# Altium PCB PCB1.PcbDoc
Units mm, origin at the board's own origin, x right, y up, seen from the top; angles counter-clockwise.
Board outline 115 x 72.5 mm, 2 copper layers (Top Layer, Bottom Layer); 54 components, 40 nets, 216 pads, 66 vias.
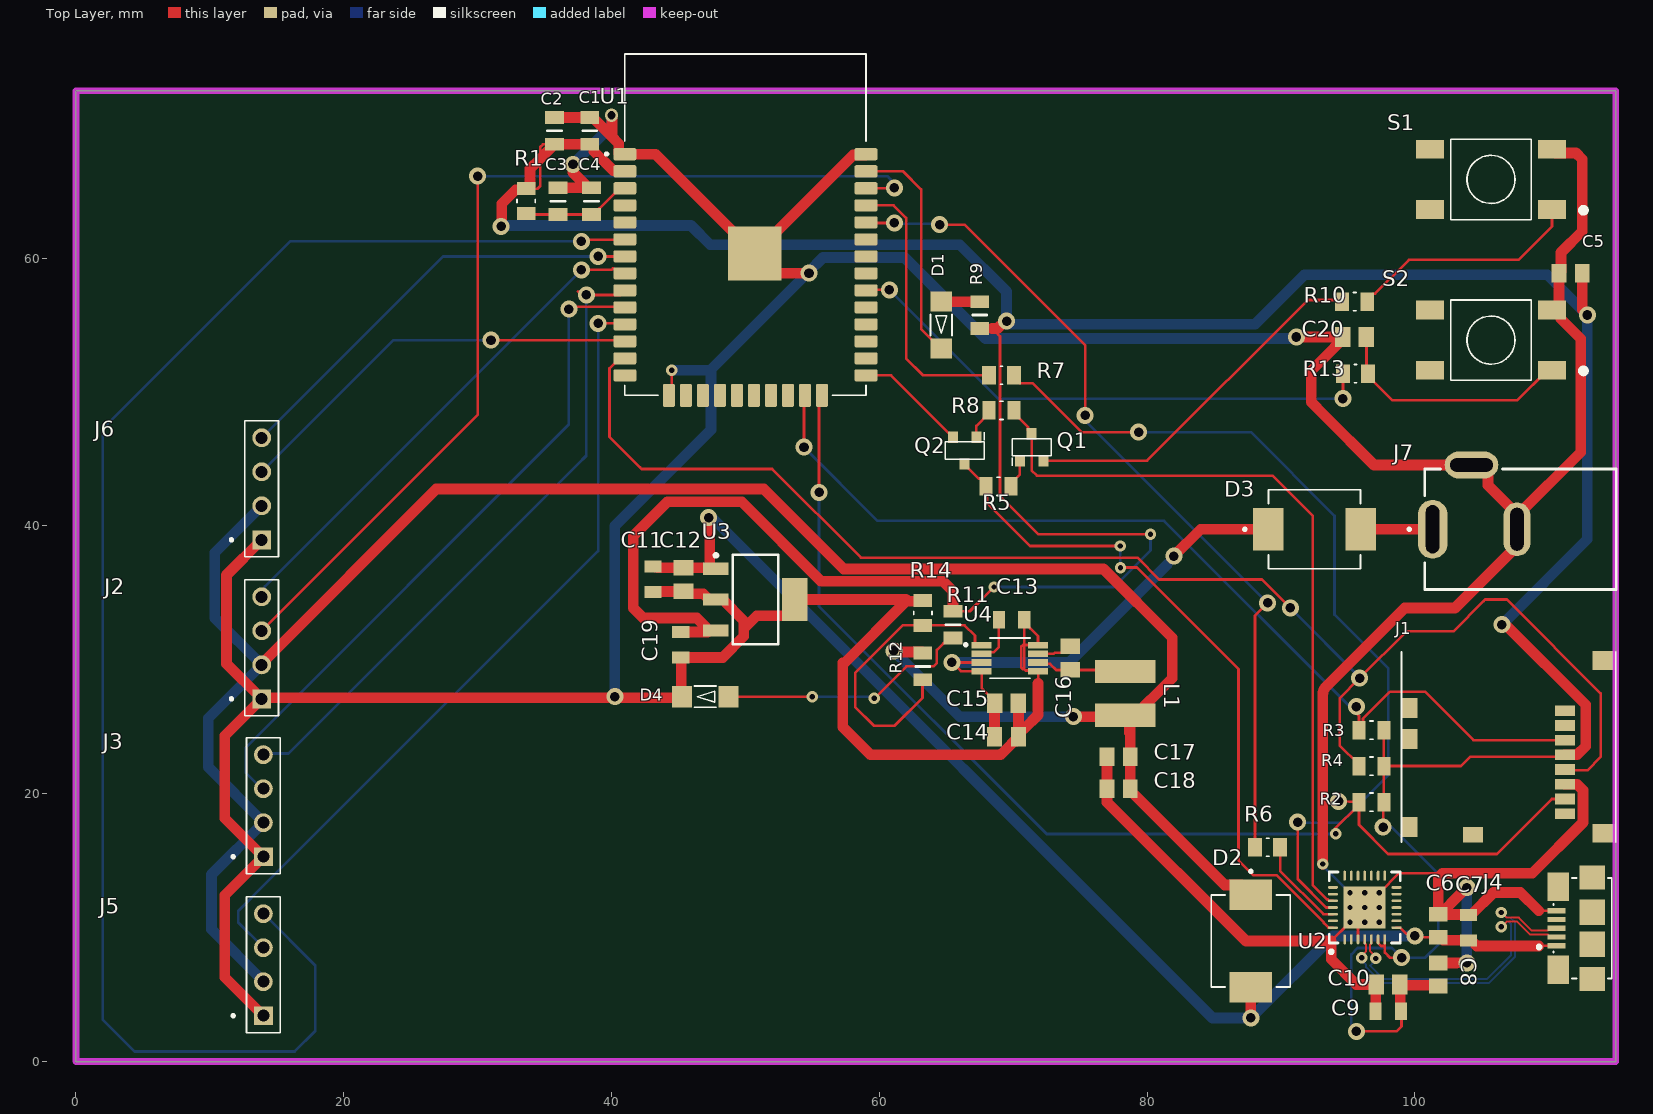
[diagram p0: Top Layer view]
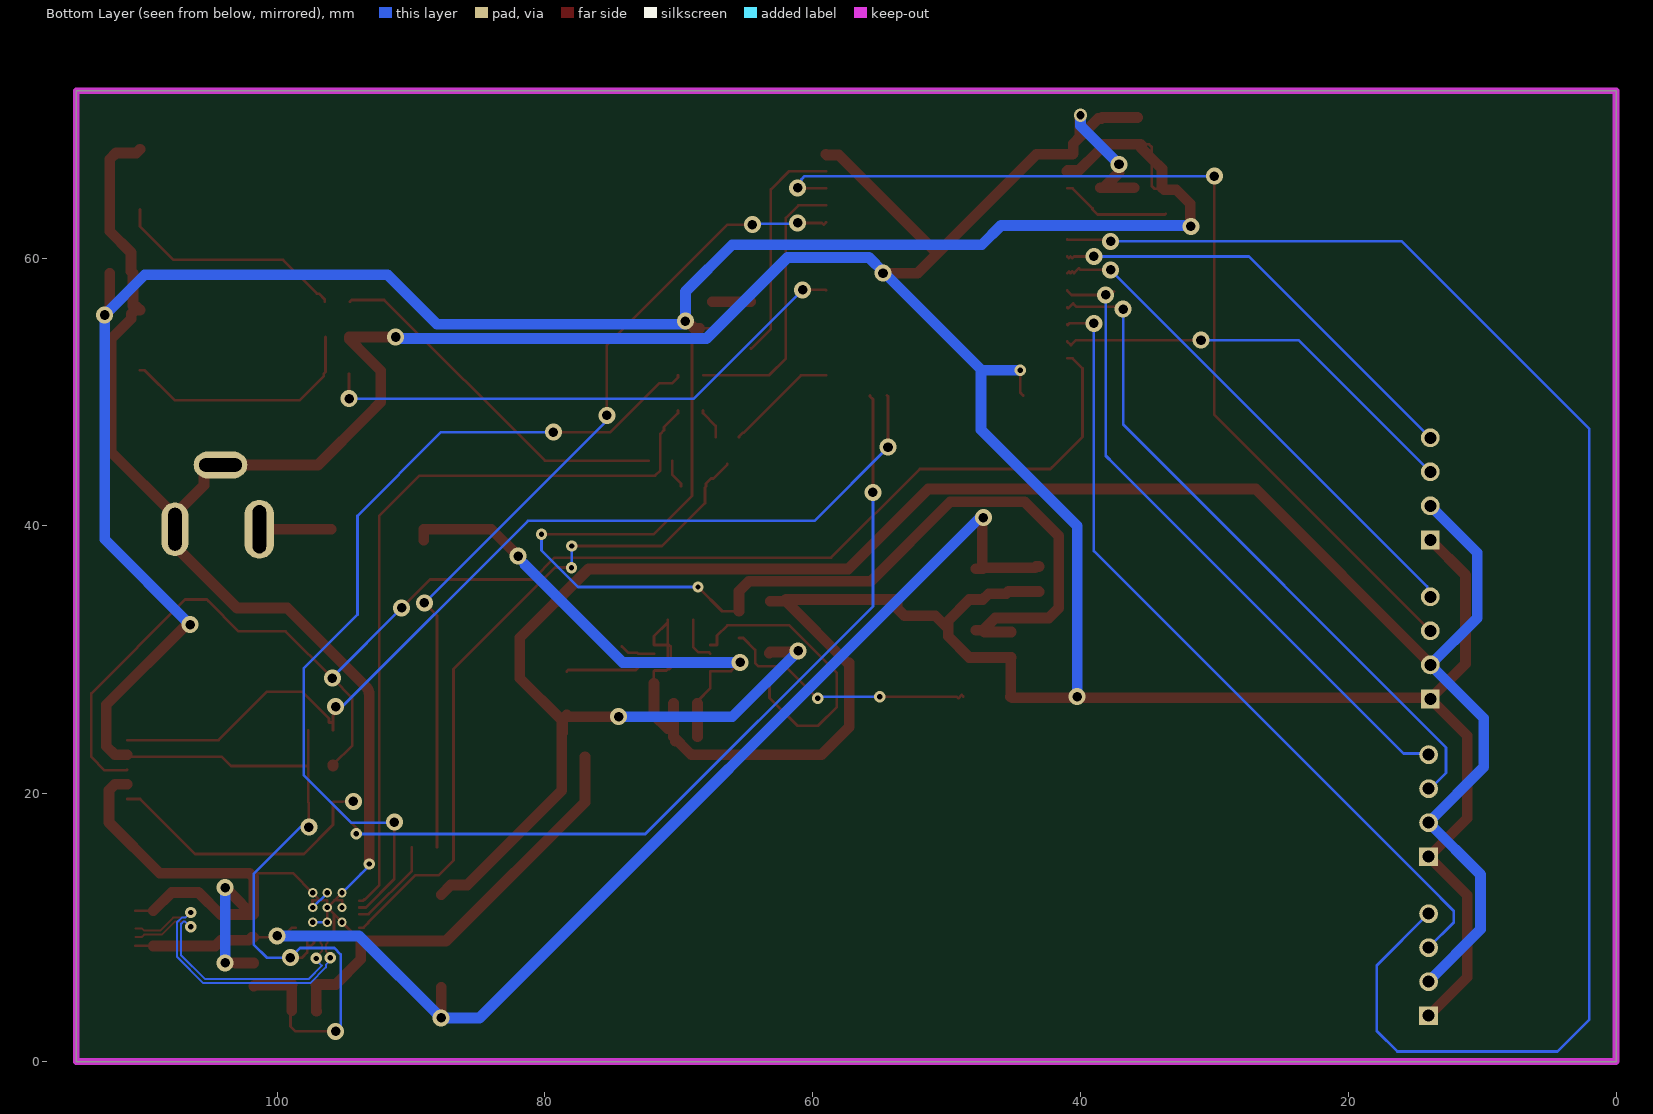
[diagram p1: Bottom Layer view, seen from below]
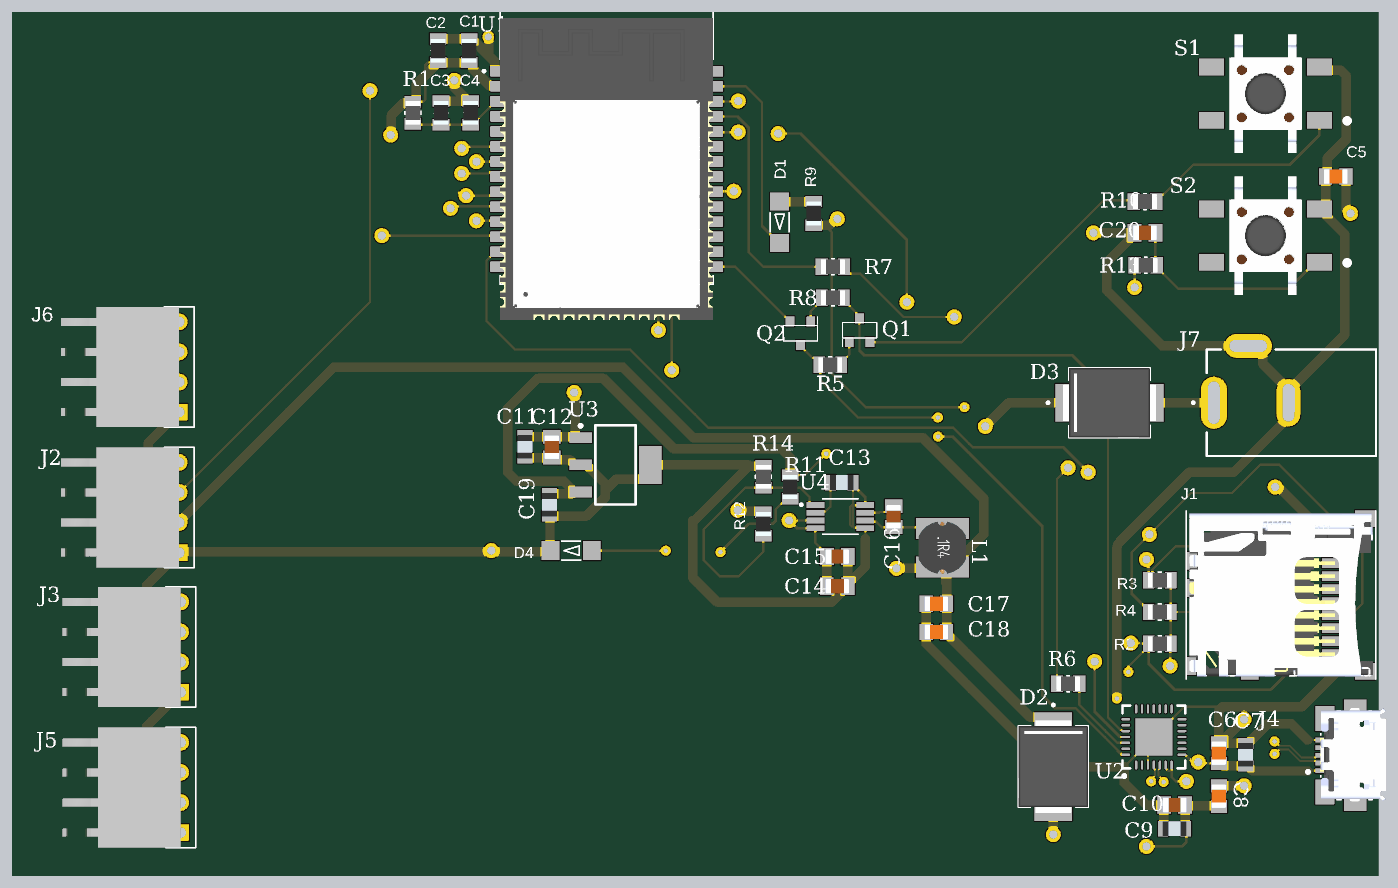
[diagram p2: 3D render of the assembled board from above, using the file's embedded part models]

## Layer stack, top to bottom
Top Solder: solder mask 0.0102, Solder Resist, Dk 3.5
Top Layer: signal copper 0.0356
Dielectric 1: dielectric 0.32, FR-4, Dk 4.8
Bottom Layer: signal copper 0.0356
Bottom Solder: solder mask 0.0102, Solder Resist, Dk 3.5

## Board outline
0,0 115,0 115,72.5 0,72.5

## Design rules (kind name [scope] priority, off if disabled: settings)
Clearance [All] p1: gap=0.15 ignorepadtopadclearanceinfootprint=FALSE
DiffPairsRouting [All] p1: maxlimit=0.15 minlimit=0.15 mostfreqgap=0.15 toplayer_minwidth=0.15 toplayer_maxwidth=0.15 toplayer_prefwidth=0.15 bottomlayer_minwidth=0.15 bottomlayer_maxwidth=0.15 bottomlayer_prefwidth=0.15 maxuncoupledlength=12.7
HoleSize [All] p1: absolutevalues=TRUE maxlimit=3.6 minlimit=0.3 maxpercent=80.000 minpercent=20.000
HoleToHoleClearance [All] p1: gap=0.254 allowstackedmicrovias=FALSE
PolygonConnect [All] p1: thpad.connectstyle=Relief thpad.reliefconductorwidth=0.254 thpad.reliefentries=4 thpad.polygonreliefangle="90 Angle" thpad.airgapwidth=0.254 smdpad.connectstyle=Relief smdpad.reliefconductorwidth=0.254 smdpad.reliefentries=4 smdpad.polygonreliefangle="90 Angle" smdpad.airgapwidth=0.254 via.connectstyle=Direct via.reliefconductorwidth=0.254 via.reliefentries=4 via.polygonreliefangle="90 Angle" via.airgapwidth=0.254
RoutingVias [All] p1: holewidth=0.4 width=0.85 viastyle="Through Hole" minholewidth=0.4 minwidth=0.7 maxholewidth=0.8 maxwidth=1.5
SilkToSilkClearance [All] p1: silktosilkclearance=0
SilkToSolderMaskClearance [IsPad] p1: minsilkscreentomaskgap=0.15 clearancetoexposedcopper=TRUE
SolderMaskExpansion [All] p1: expansion=0.102 istentingtop=FALSE
Width [All] p1: maxlimit=0.8 minlimit=0.15 preferedwidth=0.2
25 further rules are at their usual default settings.

## Classes and differential pairs
differential pair USB: +USB_P -USB_N

## Components (designator, comment, footprint, x,y, rotation, side; value= is the part's Value field where it differs from the comment)
C1 "08055C104KAT4A" RESC2012X60N 38.375,69.5 r270 top value=0.1uF/50V
C2 "CL21A106KAYNNNE" RESC2012X60N 35.75,69.5 r270 top value=10uF/25V
C3 "CL21A106KAYNNNE" RESC2012X60N 36,64.25 r270 top value=10uF/25V
C4 "08055C104KAT4A" RESC2012X60N 38.5,64.25 r270 top value=0.1uF/50V
C5 "CL21A106KAYNNNE" CAPC2012X135N 111.625,58.875 r0 top value=10uF/25V
C6 "CL21A106KAYNNNE" CAPC2012X135N 101.75,10.137 r270 top value=10uF/25V
C7 "885012207022" WCAP-CSGP_885012207022 104,10 r90 top value=1uF
C8 "CL21A106KAYNNNE" CAPC2012X135N 101.75,6.5 r270 top value=10uF/25V
C9 "885012207022" WCAP-CSGP_885012207022 98,3.75 r180 top value=1uF
C10 "08055C104KAT4A" CAPC2012X94N 98,5.75 r0 top value=0.1uF/50V
C11 "885012207022" WCAP-CSGP_885012207022 43.1,36.025 r270 top value=1uF
C12 "08055C104KAT4A" CAPC2012X94N 45.375,36 r90 top value=0.1uF/50V
C13 "885012207022" WCAP-CSGP_885012207022 69.875,33 r180 top value=1uF
C14 "GRM21BR61H106KE43L" CAPC2012X145N 69.5,24.25 r180 top value=10uF/50V
C15 "08055C104KAT4A" CAPC2012X94N 69.5,26.75 r180 top value=0.1uF/50V
C16 "08055C104KAT4A" CAPC2012X94N 74.25,30.12 r270 top value=0.1uF/50V
C17 "CL21A106KAYNNNE" CAPC2012X135N 77.875,22.75 r0 top value=10uF/25V
C18 "CL21A106KAYNNNE" CAPC2012X135N 77.875,20.375 r0 top value=10uF/25V
C19 "885012207022" WCAP-CSGP_885012207022 45.175,31.125 r270 top value=1uF
C20 "08055C104KAT4A" CAPC2012X94N 95.5,54.107 r0 top value=0.1uF/50V
D1 "WL-SMRW" WL-SMRW-1206-RECT 64.625,55 r90 top
D2 "SS34" DIOM7959X265N 87.75,9 r270 top
D3 "SS34" DIOM7959X265N 92.5,39.75 r0 top
D4 "WL-SMRW" WL-SMRW-1206-RECT 47,27.25 r0 top
J1 "502570-0893" MOLEX_502570-0893 107,23.5 r270 top
J2 "215297-4" TE_215297-4 13.875,30.895 r90 top
J3 "215297-4" TE_215297-4 14,19.105 r90 top
J4 "10118192-0001LF" AMPHENOL_10118192-0001LF 110.575,9.95 r90 top
J5 "215297-4" TE_215297-4 14,7.23 r90 top
J6 "215297-4" TE_215297-4 13.875,42.77 r90 top
J7 "DCJ235-05-A-XX-X_REVA" GCT_DCJ235-05-A-XX-X_REVA 107.875,39.75 r90 top
L1 "744773122" WE-PD2-S 78.375,27.5 r270 top
Q1 "SS8050-G" MBTB-T-SOT23 71.375,45.875 r90 top
Q2 "SS8050-G" MBTB-T-SOT23 66.375,45.625 r270 top
R1 "ESR10EZPF1002" RESC2012X65N 33.625,64.25 r90 top value=10K/1%
R2 "ESR10EZPF1002" RESC2012X65N 96.75,19.375 r0 top value=10K/1%
R3 "ESR10EZPF1002" RESC2012X65N 96.75,24.75 r0 top value=10K/1%
R4 "ESR10EZPF1002" RESC2012X65N 96.75,22.063 r0 top value=10K/1%
R5 "ESR10EZPF1002" RESC2012X65N 68.9,42.95 r0 top value=10K/1%
R6 "ERJ-PB6B4700V" RESC2012X70N 89,16 r0 top value=470R
R7 "ERJ-PB6B4700V" RESC2012X70N 69.125,51.25 r0 top value=470R
R8 "ESR10EZPF1002" RESC2012X65N 69.125,48.625 r180 top value=10K/1%
R9 "RK73H2ATTD1100F" RESC2012X60N 67.5,55.75 r270 top
R10 "ERJ-PB6B4700V" RESC2012X70N 95.5,56.75 r0 top value=470R
R11 "RK73H2ATTD1100F" RESC2012X60N 65.5,32.625 r90 top
R12 "ERJ-PB6B5232V" RESC2012X60N 63.25,29.5 r90 top value=52K3
R13 "ERJ-PB6B4700V" RESC2012X70N 95.565,51.375 r0 top value=470R
R14 "ESR10EZPF1002" RESC2012X65N 63.25,33.5 r270 top value=10K/1%
S1 "5-1437565-0" SW_5-1437565-0 105.685,65.875 r180 top
S2 "5-1437565-0" SW_5-1437565-0 105.685,53.875 r180 top
U1 "ESP-WROOM-32" MODULE_ESP-WROOM-32 50,59.5 r0 top
U2 "CP2109-A01-GM" SLAB-QFN-28-3125x3125TP_L 96.25,11.5 r90 top
U3 "TC1264-3.3VDBTR" SOT-223-DB3_L 50.75,34.5 r0 top
U4 "MCP16311T-E/MS" SOP65P490X110-8N 69.75,30.125 r0 top

## Footprints (in the part's own frame and the unit in brackets; to place one, negate y for a bottom-side part, rotate by r counter-clockwise, add the part's x,y. Pads: shape width x height; smd on the part's side, far side on the other; paste and mask are expansions set on the pad)
AMPHENOL_10118192-0001LF [mm]
  rect 0.4x1.35 smd: 1(-1.3,0) 2(-0.65,0) 3(0,0) 4(0.65,0) 5(1.3,0)
  rect 2.1x1.6 smd: SH1(-3.1,-0.125) SH2(3.1,-0.125)
  rect 1.8x1.9 smd: SH3(-3.8,-2.675) SH6(3.8,-2.675)
  rect 1.9x1.9 smd: SH4(-1.2,-2.675) SH5(1.2,-2.675)
  silkscreen extent -3.75,-4.13 3.75,1.4, body extent -3.9,-5.34 4,0.28, height 2.7
CAPC2012X94N [mm]
  rect 1.16x1.47 smd: 1(-0.88,0) 2(0.88,0)
  body extent -1,-0.62 1.01,0.63, height 0.94
CAPC2012X135N [mm]
  rect 1.1x1.38 smd: 1(-0.863,0) 2(0.863,0)
  body extent -1,-0.63 1,0.63, height 1.35
CAPC2012X145N [mm]
  rect 1.11x1.47 smd: 1(-0.9,0) 2(0.9,0)
  body extent -1,-0.63 1,0.63, height 1.45
DIOM7959X265N [mm]
  rect 2.25x3.18 smd: A(3.455,0) C(-3.455,0)
  silkscreen extent -5.3,-2.95 3.44,2.95, body extent -3.97,-2.95 3.98,2.95, height 1.2
GCT_DCJ235-05-A-XX-X_REVA [mm]
  oval 4.4x2.2 hole 1 slot 3.6 at 0 deg: 1(0,6.55)
  oval 4x2 hole 1 slot 3.2 at 0 deg: 2(0,0.25)
  oval 2x4 hole 1 slot 3.2 at 90 deg: 3(4.8,3.65)
  silkscreen extent -4.5,-7.15 4.5,8.4
MBTB-T-SOT23 [mm]
  rect 0.85x0.75 smd: 1(-1,0.875) 2(-1,-0.875) 3(1,0)
  silkscreen extent -1.37,-1.45 0.65,1.45
MODULE_ESP-WROOM-32 [mm]
  rrect22% 1.7x0.9 smd: 1(-9,8.255) 2(-9,6.985) 3(-9,5.715) 4(-9,4.445) 5(-9,3.175) 6(-9,1.905) 7(-9,0.635) 8(-9,-0.635) 9(-9,-1.905) 10(-9,-3.175) 11(-9,-4.445) 12(-9,-5.715) 13(-9,-6.985) 14(-9,-8.255) 25(9,-8.255) 26(9,-6.985) 27(9,-5.715) 28(9,-4.445) 29(9,-3.175) 30(9,-1.905) 31(9,-0.635) 32(9,0.635) 33(9,1.905) 34(9,3.175) 35(9,4.445) 36(9,5.715) 37(9,6.985) 38(9,8.255)
  rect 4x4 smd: 1.1(0.7,0.845)
  rrect22% 0.9x1.7 smd: 15(-5.715,-9.755) 16(-4.445,-9.755) 17(-3.175,-9.755) 18(-1.905,-9.755) 19(-0.635,-9.755) 20(0.635,-9.755) 21(1.905,-9.755) 22(3.175,-9.755) 23(4.445,-9.755) 24(5.715,-9.755)
  silkscreen extent -10.46,-9.75 9,15.75, body extent -9,-12.75 9,12.75, height 3.25
MOLEX_502570-0893 [mm]
  rect 0.8x1.5 smd: 1(-2.7,4.2) 2(-1.6,4.2) 3(-0.5,4.2) 4(0.6,4.2) 5(1.7,4.2) 6(2.8,4.2) 7(3.9,4.2) 8(5,4.2)
  rect 1.15x1.5 smd: DL(6.575,-2.65)
  rect 1.5x1.15 smd: DS(-0.6,-7.375) SM3(-2.9,-7.375) SM4(6,-7.375)
  rect 1.4x1.7 smd: SM1(-6.45,7.1) SM2(6.45,7.1)
  silkscreen extent -7.1,-8 7.1,8, body extent -6.9,-7.75 6.9,7.75, height 1.95
RESC2012X60N [mm]
  rect 0.95x1.4 smd: 1(-1,0) 2(1,0)
  silkscreen extent 0,-0.53 0,0.53, body extent -1,-0.63 1,0.63, height 0.6
RESC2012X65N [mm]
  rect 0.97x1.38 smd: 1(-0.93,0) 2(0.93,0)
  silkscreen extent -0.12,-0.68 0.12,0.68, body extent -1,-0.63 1,0.63, height 0.65
RESC2012X70N [mm]
  rect 1.04x1.38 smd: 1(-0.94,0) 2(0.94,0)
  silkscreen extent -0.1,-0.68 0.1,0.68, body extent -1,-0.63 1,0.63, height 0.7
SLAB-QFN-28-3125x3125TP_L [mm] "QFN, 28-Leads, Body 5x5mm, Pitch 0.5mm, Thermal Pad 3.13x3.13mm, IPC High Density"
  oval 0.75x0.2 smd: 1(-2.375,1.5) 2(-2.375,1) 3(-2.375,0.5) 4(-2.375,0) 5(-2.375,-0.5) 6(-2.375,-1) 7(-2.375,-1.5) 15(2.375,-1.5) 16(2.375,-1) 17(2.375,-0.5) 18(2.375,0) 19(2.375,0.5) 20(2.375,1) 21(2.375,1.5)
  oval 0.2x0.75 smd: 8(-1.5,-2.375) 9(-1,-2.375) 10(-0.5,-2.375) 11(0,-2.375) 12(0.5,-2.375) 13(1,-2.375) 14(1.5,-2.375) 22(1.5,2.375) 23(1,2.375) 24(0.5,2.375) 25(0,2.375) 26(-0.5,2.375) 27(-1,2.375) 28(-1.5,2.375)
  rect 3.13x3.13 smd: 29(0,0)
  silkscreen extent -3.42,-2.65 2.65,2.65, body extent -2.5,-2.5 2.5,2.5, height 1
SOP65P490X110-8N [mm]
  rect 1.5x0.49 smd: 1(-2.105,0.975) 2(-2.105,0.325) 3(-2.105,-0.325) 4(-2.105,-0.975) 5(2.105,-0.975) 6(2.105,-0.325) 7(2.105,0.325) 8(2.105,0.975)
  silkscreen extent -3.4,-1.5 1.5,1.5
SOT-223-DB3_L [mm] "SOT223, 4-Leads, Body 6.5x3.5mm, Pitch 2.3mm, Lead Span 7mm, IPC High Density"
  rect 1.9x0.9 smd: 1(-2.95,2.3) 2(-2.95,0) 3(-2.95,-2.3)
  rect 1.9x3.2 smd: 4(2.95,0)
  silkscreen extent -3.07,-3.35 1.7,3.42, body extent -1.85,-3.35 1.85,3.35, height 1.8
SW_5-1437565-0 [mm]
  rect 2.1x1.4 smd: 1(-4.55,2.25) 2(4.55,2.25) 3(-4.55,-2.25) 4(4.55,-2.25)
  silkscreen extent -7.1,-3 3,3, body extent -3,-5 3,5, height 7.26
TE_215297-4 [mm]
  rect 1.408x1.408 hole 0.9: 1(-3.81,0)
  round 1.408 hole 0.9: 2(-1.27,0) 3(1.27,0) 4(3.81,0)
  silkscreen extent -5.08,-1.26 5.08,2.36, body extent -5.08,0 5.08,10, height 1.26
WCAP-CSGP_885012207022 [mm]
  rect 0.9x1.3 smd: 1(-0.95,0) 2(0.95,0)
  body extent -1,-0.62 1,0.63, height 0.63
WE-PD2-S [mm] "SMD Inductor, 2-Leads, Body 4.5 x 4.0 mm"
  rect 1.75x4.5 smd: 1(-1.625,0) 2(1.625,0)
  body extent -2.23,-2 2.23,2, height 3.17
WL-SMRW-1206-RECT [mm]
  rect 1.5x1.6 smd: 1(-1.75,0) 2(1.75,0)
  silkscreen extent -0.8,-0.8 0.8,0.8

## Part data
C1 C4 C10 C12 C15 C16 C20: ".1UF 50V 10% 0805", Package=None, Availability=Unavailable, MF="{'manufacturer': u'AVX'}", MP=08055C104KAT4A, Price=None
C2 C3 C5 C6 C8 C17 C18: "Cap Ceramic 10uF 25V X5R 10% SMD 0805 85Â°C Embossed T/R", Package=None, Availability=Unavailable, MF="{'manufacturer': u'Samsung'}", MP=CL21A106KAYNNNE, Price=None
C7 C9 C11 C13 C19: "<b> WCAP-CSGP Ceramic Capacitors <br> <br> <br><b>Characteristics </b><br> </b><br>Multilayer Ceramic Chip Capacitor <br>Recommended soldering:Reflow, for 0603 and 0805 wave soldering is also allowed <br>Operating temperature:-55 Â°C to +125 Â°C; <br>Ceramic characteristics: Class I - NPO ; Class II -X7R, X5R <br>High performance ceramic <br>High capacitance stability <br>Minimal aging  <br>Termination:Cu/Ni/Sn <br>   <br><a href=\"http://katalog.we-online.de/media/images/eisos/WCAP-CSGP_pf2.jpg\" title=\"Enlarge picture\"> <img src=\"http://katalog.we-online.de/media/thumbs2/eisos/thb_WCAP-CSGP_pf2.jpg\" width=\"320\"></a><p> Details see: <a href=\"http://katalog.we-online.de/en/pbs/WCAP-CSGP-0805?\">http://katalog.we-online.de/en/pbs/WCAP-CSGP-0805? </a><p>Created:  2015-01-28 <br>2015 (C) Wurth Elektronik", Package=None, Availability=Unavailable, MF="{'manufacturer': u'Wurth Electronics Inc'}", MP=885012207022, Price=None
C14: "SMD Capacitor X5R(EIA) with Capacitance: 10uF Tol. 10%. Rated Voltage: 50Vdc", Package=None, Availability=Unavailable, MF="{'manufacturer': u'Murata Electronics'}", MP=GRM21BR61H106KE43L, Price=None
D1 D4: "<b>SMD Reverse mount mono-color rectangular <br> <br> <br><b> Characteristics <br><br></b></b> Small size & thin body for space saving  <br> Ideal for narrow space applications  <br> Wide viewing angle  <br> Low power consumption  <br> Industry standard footprint  <br> Small package for exceptional brightness <br> To emit light through a small cut-out hole in PCB  <br> Compatible with automatic placement machine <br>  <br><b> Applications  <br><br></b> Front panel indicators  <br> LCD backlighting  <br> Keypad backlighting  <br> Push button backlighting  <br> Symbol and switch backlighting  <br> General lighting <br> <br> <br> <br><a href=\"http://katalog.we-online.de/media/images/eipal/WL-SMRW_pf2.jpg\" title=\"Enlarge picture\"> <img src=\"http://katalog.we-online.de/media/thumbs2/eipal/thb_WL-SMRW_pf2.jpg\" width=\"320\"></a><p> Details see: <a href=\"http://katalog.we-online.de/en/led/WL-SMRW?m\">http://katalog.we-online.de/en/led/WL-SMRW?m</a><p>  </b>Updated  2015-04-10<br> </b>2015 (C) Wurth Elektronik", Package=None, Availability=Unavailable, MF="{'manufacturer': u'Wurth Electronics'}", MP=WL-SMRW, Price=None
D2 D3: "Diode Schottky 40V 3A 2-Pin SMC T/R", Package=None, Availability=Unavailable, MF="{'manufacturer': u'ON Semiconductor'}", MP=SS34, Price=None
J1: "<b>1.10mm Pitch microSD Memory Card Connector, Normal Mount Surface Mount, Push-Push Type</b><p>http://www.snapeda.com/parts/502570-0893/Molex/view-part/", Package=None, Availability=Unavailable, MF="{'manufacturer': u'Molex'}", MP=502570-0893, Price=None
J2 J3 J5 J6 R6 R7 R10 R12 R13: Package=None, Availability=Unavailable, Price=None
  J2 J3 J5 J6: MF="{'manufacturer': u'TE Connectivity'}", MP=215297-4
  R6 R7 R10 R13: MF="{'manufacturer': u'Panasonic'}", MP=ERJ-PB6B4700V
  R12: MP=ERJ-PB6B5232V
J4: "Single Port 5 Contact Horizontal Right Angle Shielded Micro B USB 2.0 Connector", Package=None, Availability=Unavailable, MF="{'manufacturer': u'FCI'}", MP=10118192-0001LF, Price=None
J7: "DC Power Jack, Thru-Hole, Horizontal, with Locating Pegs, D2.35mm", Package=None, Availability=Unavailable, MF="{'manufacturer': u'Global Connector Technology'}", MP=DCJ235-05-A-XX-X_REVA, Price=None
L1: "SMD Power Inductor WE-PD2, L = 22.0 µH", Inductance="22.0 µH", ComponentLink1Description="Manufacturer Link", ComponentLink1URL=http://www.we-online.com, ComponentLink2Description=Datasheet, ComponentLink2URL=http://www.we-online.de/katalog/media/pdf/744773122.pdf, DatasheetVersion="ver 1, Oct-2004", PackageDescription="SMD Inductor, 2-Leads, Body 4.5 x 4.0 mm", PackageReference=WE-PD2-S, PackageVersion=2004, PartNumber=744773122
Q1 Q2: "<b>Bipolar Transistors - BJT NPN TRANSISTOR 1.5A 40V</b><p> Source: <a href=\"https://componentsearchengine.com/Datasheets/1/SS8050-G.pdf\"> Datasheet </a>", Package=None, Availability=Unavailable, MF="{'manufacturer': u'Comchip Technology'}", MP=SS8050-G, Price=None
R1 R2 R3 R4 R5 R8 R14: "RES SMD 10K OHM 1% 0.4W 0805", Package=None, Availability=Unavailable, MF="{'manufacturer': u'Rohm'}", MP=ESR10EZPF1002, Price=None
R9 R11: "Resistor", Manufacturer_Name="KOA Speer", Datasheet Link=http://www.koaspeer.com/catimages/Products/RK73H/RK73H.pdf, Height=0.6mm, Manufacturer_Part_Number=RK73H2ATTD1100F
S1 S2: "Switch Tactile OFF (ON) Round Button Gull Wing 0.05A 12VDC 1.57N SMD T/R", Package=None, Availability=Unavailable, MF="{'manufacturer': u'TE Connectivity'}", MP=5-1437565-0, Price=None
U1: "Module: combo; GPIO, I2C x2, I2S x2, SDIO, SPI x3, UART x3; 19.5dBm", Package=None, Availability=Unavailable, MF="{'manufacturer': u'Espressif Systems'}", MP=ESP-WROOM-32, Price=None
U2: "Single-Chip USB to UART Bridge, 1024 Bytes EEPROM, -40 to 85 degC, 28-pin QFN, Tube", Manufacturer="Silicon Labs", Code_IPC=J-STD-020C, Code_JEDEC=MO-220, ComponentLink1Description="Manufacturer URL", ComponentLink1URL=http://www.silabs.com/, ComponentLink2Description=Datasheet, ComponentLink2URL=http://www.silabs.com/Support%20Documents/TechnicalDocs/CP2102-9.pdf, ComponentLink3Description="Package Specification", ComponentLink3URL=http://www.silabs.com/Support%20Documents/TechnicalDocs/C8051T61x.pdf, DatasheetVersion="Rev. 1.5", EEPROM="1024 Bytes", Internal Oscillator=TRUE, Mounting Technology="Surface Mount", PackageDescription="28-Pin Quad-Flat No-Leads Package, Body 5 x 5 mm, Pitch 0.5 mm", PackageReference=QFN-28, PartNumber=CP2109-A01-GM, Sub-Family="USB Bridges"
U3: "800 mA Fixed-Output CMOS LDO with Shutdown, 3-Pin SOT-223, Extended Temperature, Tape and Reel", DatasheetVersion="revC, Oct-2006", PackageDescription="3-Lead Plastic Small Outline Transistor (DB) [SOT-223]", PackageReference=SOT-223-DB3, PackageVersion="revBB, Aug-2009", PartNumber=TC1264-3.3VDBTR
U4: "The MCP16311/2 is a compact, high-efficiency, fixed frequency, synchronous step-down DC-DC converter in an 8-pin MSOP, or 2 x 3 TDFN package that operates from input voltage sources up to 30V. Integrated features include a high-side and a low-side switch, fixed frequency peak current mode control, internal compensation, peak current limit and overtemperature protection. The MCP16311/2 provides all the active functions for local DC-DC conversion, with fast transient response and accurate regulation.", Package=None, Availability=Unavailable, MF="{'manufacturer': u'Microchip Technology'}", MP=MCP16311T-E/MS, Price=None

## Via types
v1: diameter 1.27, hole 0.711, Top Layer to Bottom Layer, 43 vias
v2: diameter 0.85, hole 0.4, Top Layer to Bottom Layer, 13 vias
v3: diameter 0.7, hole 0.4, Top Layer to Bottom Layer, 9 vias
v4: diameter 1, hole 0.62, Top Layer to Bottom Layer, 1 vias

## Nets (pads, with @x,y where several pads share a name; then routed paths per layer and width w, separated by ;. In a path a pad name is that pad's centre, name@x,y a point inside that pad or via, vN(x,y) a via of type N, cw(c..) or ccw(c..) an arc to the next point about the centre after c; other vN are vias at no path point)
DTR: Q2.3 R5.1 U2.28 | length 52
  Top Layer w0.2: Q2.3 66.375,44.575 67.41,43.54 67.585,43.54 67.97,43.155 R5.1 68.048,42.872 68.048,41.702 71.25,38.5 v2(78,38.5) ; v2(78.013,36.888) 79.237,36.888 86.825,29.3 86.825,15.013 87.918,13.921 89.673,13.921 93.2,10.393 93.2,10.334 93.534,10 U2.28
  Bottom Layer w0.2: v2(78,38.5) 78,36.901 v2(78.013,36.888)
EN: Q1.2 R10.1 | length 27.3
  Top Layer w0.2: Q1.2 80,44.875 92,56.875 94.435,56.875 R10.1
GND: C1.1 C2.1 C3.1 C4.1 C5.1 C6.1 C7.2 C8.1 C9.2 C10.1 C11.2 C12.1 C13.1 C14.1 C15.1 C17.1 C18.1 C19.2 C20.1 D4.1 J1.6 J2.1 J3.1 J4.5 J5.1 J6.1 J7.2 J7.3 R14.1 S1.3 S2.3 U1.1 U1.1.1 U1.15 U1.38 U2.3 U2.29 U3.2 U3.4 U4.5 U4.8 | length 492.5
  Top Layer w0.2: U1.15 44.5,49.96 v2(44.5,51.625) ; 57.272,29.782 61.99,34.5 ; R14.1@63.169,34.365 63.234,34.43 R14.1 ; 69.055,23.243 69.401,23.243 ; C14.1@70.245,23.915 69.573,23.243 69.401,23.243 ; C14.1 70.4,24.43 70.825,24.855 70.825,24.667 70.404,24.246 69.401,23.243 ; C13.1 C13.1@70.825,32.8 ; 70.922,29.198 71.807,29.198 U4.5 71.875,29.13 71.875,28.25 ; 93.743,8.993 v3(95.15,10.4) U2.29@95.75,11 ; v3(95.15,11.5) 95.131,11.519 95.131,12.041 U2.29@95.709,12.041 ; U2.3 U2.29@95.75,11 ; v3(96.25,10.4) v3(96.25,11.5) ; v3(97.35,11.5) 97.35,12.041 U2.29@96.791,12.041 ; 102.063,14.062 101.75,14.062 98.813,14.062 v3(97.35,12.6) U2.29@96.791,12.041 ; 109.25,11.25 J4.5 ; S2.3@110.481,56.371 110.762,56.371 S2.3@110.762,56.425 ; C13.1@70.825,32.8 70.825,31.1 70.825,29.295 70.719,29.295 70.602,29.412 70.602,30.977 70.725,31.1 U4.8 71.855,31.77 C13.1@70.825,32.8 ; U2.29@95.709,12.041 95.193,12.557 v3(95.15,12.6) U2.29@95.709,12.041 ; U2.29@95.709,12.041 v3(96.25,11.5) ; U2.29@95.709,12.041 v3(96.25,11.5) ; U2.29@95.75,11 v3(96.25,11.5) ; v3(96.25,11.5) 96.25,12.041 U2.29@96.791,12.041
  Top Layer w0.8: J6.1 11.25,36.335 11.25,29.71 J2.1 ; J5.1 11.125,6.295 11.125,12.42 J3.1 11.125,18.17 11.125,24.335 J2.1 ; C2.1 C1.1 38.45,70.425 38.675,70.425 40.038,69.062 ; C3.1 C4.1@38.275,65.25 ; v1(37.125,67) 37.125,66.4 C4.1@38.275,65.25 ; C4.1 C4.1@38.275,65.25 ; v4(40,70.671) 40.038,70.633 40.038,69.062 ; C11.2 43.122,35.098 45.353,35.098 C12.1 45.555,34.94 46.86,34.94 47.3,34.5 U3.2 48.3,34.5 49.875,32.925 49.875,32.337 ; D4.1@45.093,27.168 40.25,27.168 13.958,27.168 J2.1 ; D4.1 45.213,27.287 45.213,30.138 C19.2 48.3,30.175 49.875,31.75 49.875,32.337 ; v1(54.75,58.875) 52.17,58.875 U1.1.1 ; 57.272,29.782 57.272,24.978 59.007,23.243 59.345,22.905 69.055,22.905 69.397,23.247 70.245,24.095 C14.1@70.245,23.915 ; 57.34,29.715 61.99,34.365 R14.1@63.169,34.365 ; U1.38 58.95,67.705 58.06,67.705 52.459,62.104 U1.1.1 ; 61.99,34.5 U3.4 53.7,33.85 53.15,33.3 50.838,33.3 49.875,32.337 ; C15.1 70.39,26.74 70.39,24.26 C14.1 ; C14.1@70.825,24.855 71.855,25.885 71.855,28.23 71.875,28.25 ; C17.1 C18.1 77.012,19.363 87.382,8.993 93.743,8.993 93.743,7.632 95.625,5.75 C10.1 97.085,5.715 97.085,3.785 C9.2 ; v1(91.142,54.108) C20.1 94.62,53.953 93.226,52.559 92.25,51.582 92.25,49.25 93.226,48.274 96.95,44.55 J7.3 104.9,44.55 105.455,43.996 105.455,43.045 107.625,40.875 J7.2 ; v2(93.125,14.75) 93.125,27.419 cw(c93.925,27.419) 93.359,27.984 99.25,33.875 103,33.875 107.625,38.5 J7.2 ; C8.1 103.113,7.363 103.125,7.375 v1(103.875,7.375) ; v1(103.875,12.985) 103.375,12.485 101.89,11 C6.1 ; 109.25,11.25 107.875,12.625 105.875,12.625 104.2,10.95 C7.2 103.975,10.975 101.775,10.975 C6.1 ; S1.3 110.516,67.844 112.031,67.844 112.5,67.375 112.5,62 110.912,60.412 110.912,59.025 C5.1 S2.3@110.762,56.425 ; S2.3@110.481,56.371 S2.3 110.585,56.125 110.885,55.825 110.885,55.475 112.375,53.985 112.375,45.5 107.625,40.75 J7.2 ; J1.6 112.099,20.7 112.55,20.248 112.55,17.851 108.761,14.062 102.063,14.062 101.75,13.75 C6.1 ; 40.038,69.062 40.55,68.55 40.55,67.805 40.6,67.755 U1.1 43.29,67.755 U1.1.1
  Bottom Layer w0.2: 47.438,51.562 v1(54.75,58.875) ; v2@93.25,14.5 93.75,14 v3(95.15,12.6) ; v3(96.25,10.4) v3(97.35,10.4) ; v3(96.25,12.6) v3(97.35,11.5)
  Bottom Layer w0.8: v1(37.125,67) 40,69.875 v4(40,70.671) ; v1(40.25,27.25) 40.25,40 47.438,47.188 47.438,51.562 ; v2(44.5,51.625) 47.375,51.625 54.688,58.938 55.8,60.05 61.875,60.05 67.925,54 90.703,54 90.72,54.018 91.053,54.018 v1(91.142,54.108) ; v1(103.875,7.375) v1(103.875,12.985)
IO0: Q2.2 U1.25 | length 8.4
  Top Layer w0.2: U1.25 60.88,51.245 65.175,46.95 65.225,46.95 65.5,46.675 Q2.2
IO2/DATA0: J1.7 R2.1 U1.24 | length 85.7
  Top Layer w0.2: v1(55.5,42.5) 55.5,49.46 55.75,49.71 U1.24 ; v2(94.1,17) cw(c94.2,17.173) 94,17.173 94,17.35 R2.1@95.82,19.17 ; v1(94.31,19.435) R2.1 R2.1@95.82,19.17 ; J1.7 110.225,19.6 106.125,15.5 98,15.5 95.82,17.68 R2.1@95.82,19.17
  Bottom Layer w0.2: v1(55.5,42.5) 55.5,33.994 72.504,16.99 93.938,16.99 ccw(c93.938,17.19) 93.95,16.99 v2(94.1,17)
IO14/CLK: J1.5 R4.1 U1.13 | length 109.1
  Top Layer w0.2: U1.13 40.6,52.515 39.85,51.765 39.85,48.4 39.85,46.65 42.125,44.375 42.25,44.25 52,44.25 58.625,37.625 79.279,37.625 80.904,36 88.572,36 v1(90.697,33.875) ; R4.1@95.82,22.165 94.375,23.61 94.375,27.125 v1(95.875,28.625) 99.375,32.125 102.867,32.125 105.125,34.383 105.242,34.5 106.883,34.5 107,34.383 107,34.375 113.875,27.5 113.875,22.75 112.875,21.75 111.25,21.75 J1.5
  Top Layer w0.8: R4.1 R4.1@95.82,22.165
  Bottom Layer w0.2: v1(90.697,33.875) 95.875,28.697 v1(95.875,28.625)
IO15/CMD: J1.3 R3.1 U1.23 | length 73
  Top Layer w0.2: v1(54.375,45.875) 54.375,49.675 U1.23 ; v1(95.625,26.5) 95.625,26.008 95.752,25.881 95.82,25.82 R3.1@95.82,25.32 ; R3.1 R3.1@95.82,25.32 ; J1.3 104.375,24 100.75,27.625 98.125,27.625 96.123,25.623 96.123,25.34 96.103,25.32 R3.1@95.82,25.32
  Bottom Layer w0.2: v1(54.375,45.875) 59.875,40.375 81.258,40.375 95.133,26.5 v1(95.625,26.5)
IO18: R13.1 U1.30 | length 40.9
  Top Layer w0.2: U1.30 59.03,57.625 v1(60.75,57.625) ; v1(94.625,49.5) R13.1
  Bottom Layer w0.2: v1(60.75,57.625) 68.875,49.5 v1(94.625,49.5)
IO22/PWM22: J2.3 U1.36 | length 74.5
  Top Layer w0.2: J2.3 30,48.29 v1(30,66.125) ; U1.36 61.09,65.215 v1(61.125,65.25)
  Bottom Layer w0.2: v1(30,66.125) 30.01,66.115 60.603,66.115 60.718,66 60.836,65.883 60.836,65.829 61.125,65.54 v1(61.125,65.25)
IO23: D1.1 U1.37 | length 17.2
  Top Layer w0.2: U1.37 61.765,66.485 63.125,65.125 63.125,54.7 64.575,53.25 D1.1
IO25/PWM25: J3.3 U1.10 | length 51
  Top Layer w0.2: v1(36.808,56.183) 36.99,56.365 40.29,56.365 40.55,56.625 40.925,56.25 U1.10
  Bottom Layer w0.2: J3.3 13.875,20.375 12.7,21.55 12.7,23.45 36.808,47.557 v1(36.808,56.183)
IO26/PWM26: J5.3 U1.11 | length 60.6
  Top Layer w0.2: v1(39,55.125) 40.82,55.125 40.945,55 U1.11
  Bottom Layer w0.2: J5.3 12.125,10.375 12.125,11.25 14.125,13.25 39,38.125 v1(39,55.125)
IO27/PWM27: J6.3 U1.12 | length 31.5
  Top Layer w0.2: v1(31,53.875) 40.34,53.875 40.715,53.5 U1.12
  Bottom Layer w0.2: J6.3 23.71,53.875 v1(31,53.875)
IO32/ADC1-4: J2.4 U1.8 | length 38
  Top Layer w0.2: v1(37.75,59.125) 39.99,59.125 40.115,59.25 40.49,58.875 40.615,59 40.74,58.875 40.865,59 U1.8
  Bottom Layer w0.2: J2.4 14.106,34.936 14.106,35.481 v1(37.75,59.125)
IO33/ADC1-5: J3.4 U1.9 | length 49.1
  Top Layer w0.2: 37.5,57.5 37.75,57.25 v1(38.125,57.25) 40.655,57.25 U1.9
  Bottom Layer w0.2: J3.4 14.085,23 15.875,23 37.5,44.625 38.115,45.24 38.115,57.24 v1(38.125,57.25)
IO34/ADC1-6: J5.4 U1.6 | length 116.8
  Top Layer w0.2: v1(37.75,61.25) 37.875,61.375 40.97,61.375 U1.6
  Bottom Layer w0.2: J5.4 17.875,7.165 17.875,2.286 16.339,0.75 4.375,0.75 2,3.125 2,47.25 16,61.25 v1(37.75,61.25)
IO35/ADC1-7: J6.4 U1.7 | length 32.9
  Top Layer w0.2: v1(39,60.125) 40.49,60.125 40.615,60 40.74,60.125 40.865,60 U1.7
  Bottom Layer w0.2: J6.4 27.42,60.125 v1(39,60.125)
NetC3_2: C3.2 C4.2 R1.1 U1.3 | length 8.3
  Top Layer w0.2: R1.1 33.695,63.25 C3.2 C4.2 38.725,63.25 39.1,63.625 39.1,63.715 40.6,65.215 U1.3
NetC13_2: C13.2 U4.2 | length 3.5
  Top Layer w0.2: U4.2 67.75,30.555 68.519,30.555 68.925,30.961 C13.2
NetC16_1: C16.1 U4.7 | length 2.6
  Top Layer w0.2: U4.7 73.025,30.45 73.095,30.52 73.77,30.52 C16.1
NetC16_2: C16.2 L1.1 U4.6 | length 6.8
  Top Layer w0.2: U4.6 71.96,29.695 72.76,29.695 73.215,29.24 C16.2 78.26,29.24 L1.1
NetC20_2: C20.2 R13.2 S2.1 | length 18.4
  Top Layer w0.2: C20.2 96.38,51.5 R13.2 96.505,51.205 98.335,49.375 107.635,49.375 109.885,51.625 S2.1
NetD1_2: D1.2 R9.1 | length 2.9
  Top Layer w0.8: D1.2 R9.1
NetD3_A: D3.A J7.1 | length 5.4
  Top Layer w0.8: D3.A J7.1
NetD4_2: D4.2 R11.1 | length 19.4
  Top Layer w0.2: D4.2 48.875,27.375 49.125,27.125 49.25,27.25 v2(55,27.25) ; v2(59.625,27.125) 62.016,29.516 64.042,29.516 64.296,29.77 64.296,30.736 65.185,31.625 R11.1
  Bottom Layer w0.2: v2(55,27.25) 59.5,27.25 v2(59.625,27.125)
NetQ1_1: Q1.1 R5.2 | length 2.2
  Top Layer w0.2: R5.2 69.83,43.155 70.5,43.825 Q1.1
NetQ2_1: Q2.1 R8.2 | length 2.4
  Top Layer w0.2: Q2.1 67.25,47.475 68.195,48.42 R8.2
NetR10_2: R10.2 S1.1 | length 17.5
  Top Layer w0.2: R10.2 96.44,56.92 96.86,57.34 97.03,57.34 99.565,59.875 107.75,59.875 110.235,62.36 S1.1
NetR12_1: R12.1 R14.2 U4.1 | length 22.3
  Top Layer w0.2: R12.1 63.229,28.5 63.229,27.162 61.141,25.075 59.595,25.075 58.2,26.47 58.2,29.025 61.745,32.57 R14.2 66.378,32.57 67.14,31.808 67.14,31.1 U4.1
RTS: Q1.3 R8.1 U2.24 | length 57
  Top Layer w0.2: R8.1 70.055,48.42 71.1,47.375 71.1,47.15 Q1.3 71.375,44.154 71.779,43.75 89.375,43.75 92.375,40.75 92.375,13.159 93.434,12.1 93.5,12.1 93.6,12 U2.24
RXD: R6.1 U1.34 | length 63.8
  Top Layer w0.2: U1.34 59.175,62.5 59.3,62.625 v1(61.125,62.625) ; v1(64.5,62.5) 66.375,62.5 75.375,53.5 v1(75.375,48.25) ; R6.1 88.06,33.31 v1(89,34.25)
  Bottom Layer w0.2: v1(61.125,62.625) 61.188,62.562 64.438,62.562 v1(64.5,62.5) ; v1(75.375,48.25) 75.375,47.875 v1(89,34.25)
RXD_CP2109: R7.2 U2.25 | length 65.4
  Top Layer w0.2: R7.2 70.065,51.08 70.485,50.66 71.451,50.66 75.111,47 v1(79.375,47) ; v1(91.25,17.875) 91.25,13.625 93.375,11.5 U2.25
  Bottom Layer w0.2: v1(79.375,47) 87.75,47 94,40.75 94,33.375 98,29.375 98,21.375 94.467,17.842 91.283,17.842 v1(91.25,17.875)
TXD: R7.1 U1.35 | length 20.6
  Top Layer w0.2: U1.35 61.057,63.945 62.01,62.992 62.01,52.49 63.25,51.25 R7.1
TXD_CP2109: R6.2 U2.26 | length 7
  Top Layer w0.2: R6.2 89.94,14.219 93.159,11 U2.26
USB_N: J4.2 U2.5 | length 22.1
  Top Layer w0.15: U2.5 96.75,8.837 96.65,8.737 96.65,8.244 97.074,7.82 v2(97.074,7.698) ; v2(106.45,10.075) 106.495,10.075 106.87,10.45 107.638,10.45 108.613,9.475 109.925,9.475 110.1,9.3 J4.2
  Bottom Layer w0.15: v2(97.074,7.698) 97.074,7.58 96.65,7.156 97.656,6.15 105.375,6.15 107.175,7.95 107.175,10.269 106.994,10.45 106.87,10.45 106.495,10.075 v2(106.45,10.075)
USB_P: J4.3 U2.4 | length 23.5
  Top Layer w0.15: v2(96.025,7.75) 96.025,7.919 96.35,8.244 96.35,8.737 96.25,8.837 U2.4 ; v2(106.45,11.125) 106.495,11.125 106.87,10.75 107.762,10.75 108.737,9.775 109.925,9.775 110.1,9.95 J4.3
  Bottom Layer w0.15: v2(96.025,7.75) 96.025,7.561 96.35,7.236 96.35,7.032 97.531,5.85 105.499,5.85 107.475,7.826 107.475,10.394 107.119,10.75 106.87,10.75 106.495,11.125 v2(106.45,11.125)
V5V: C17.2 C18.2 D2.C J2.2 J3.2 J5.2 J6.2 L1.2 R12.2 | length 173
  Top Layer w0.2: L1.2 78.375,25.5 78.375,24.469 78.738,24.106 C17.2
  Top Layer w0.8: J2.2 13.875,29.71 26.915,42.75 51.375,42.75 57.344,36.781 76.742,36.781 81.875,31.647 81.875,28.625 78.75,25.5 78.75,24.469 78.75,22.762 C17.2 C18.2 78.738,20.235 85.793,13.18 87.025,13.18 D2.C ; J6.2@13.875,41.415 J6.2 ; v1(61.088,30.662) 61.175,30.575 63.175,30.575 R12.2 ; v1(74.5,25.75) 78.25,25.75 L1.2
  Bottom Layer w0.8: J6.2 10.375,38 10.375,33.125 J2.2 9.875,25.625 9.875,22 14,17.875 J3.2 10.125,13.96 10.125,9.875 14,6 J5.2 ; v1(61.088,30.662) 66,25.75 v1(74.5,25.75)
VDD33: C1.2 C2.2 C5.2 C8.2 C9.1 C10.2 C19.1 J1.4 R1.2 R2.2 R3.2 R4.2 R9.2 R11.2 U1.2 U2.6 U2.7 U3.3 | length 297.9
  Top Layer w0.2: R1.2 33.83,65.18 34.476,65.18 34.679,65.383 34.679,67.429 34.679,68.297 34.882,68.5 35.525,68.5 C2.2 ; C1.2 38.675,68.5 38.675,67.989 ; R11.2 66.753,33.625 v2(68.563,35.435) ; R9.2 68.424,54.75 68.627,54.547 69.02,54.154 69.02,42.23 71.875,39.375 v2(80.25,39.375) ; v1(95.625,2.25) 98.625,2.25 99,2.625 99,3.7 C9.1 C9.1@98.915,3.785 ; U2.6 97.25,8.85 97.475,8.625 97.75,8.625 ; v1(97.625,17.5) 97.625,19.32 R2.2 R4.2 ; R3.2 R4.2 ; U2.7 97.75,8.625 ; v1(99,7.75) 98.125,7.75 97.75,8.125 97.75,8.625 ; J1.4 111.05,22.75 104.125,22.75 103.438,22.063 R4.2
  Top Layer w0.8: v1(31.75,62.375) 31.81,62.435 31.81,64.061 32.844,65.095 33.745,65.095 33.83,65.18 33.915,65.265 33.915,66.665 34.679,67.429 35.45,68.2 35.45,68.425 C2.2@35.525,68.5 ; C2.2 C1.2 ; 38.675,67.989 40.129,66.535 40.95,66.535 U1.2 ; C19.1 47.175,32.075 U3.3@47.3,32.2 ; U3.3 U3.3@47.3,32.2 ; R11.2 65.5,35.125 64.75,35.875 55.653,35.875 49.728,41.8 44.175,41.8 41.625,39.25 41.625,33.875 42.375,33.125 46.375,33.125 U3.3@47.3,32.2 ; 68.424,54.75 68.83,54.75 69.373,55.293 v1(69.5,55.293) ; C10.2 C10.2@98.915,5.715 ; C9.1@98.915,3.785 C10.2@98.915,5.715 ; C8.2 101.693,5.693 98.936,5.693 C10.2@98.915,5.715 ; v1(106.5,32.625) 106.773,32.625 112.75,26.648 112.75,23.551 112.099,22.9 J1.4 ; C5.2 112.488,56.137 v1(112.875,55.75)
  Bottom Layer w0.2: v2(68.563,35.435) 77.514,35.435 80.25,38.17 v2(80.25,39.375) ; v1(95.625,2.25) 95.25,2.625 95.25,8 95.725,8.475 98.275,8.475 v1(99,7.75) 100.75,7.75 101.75,8.75 101.75,14 98.25,17.5 v1(97.625,17.5)
  Bottom Layer w0.8: v1(31.75,62.375) 31.81,62.435 45.94,62.435 47.375,61 66,61 69.5,57.5 v1(69.5,55.293) 69.5,55.058 88.058,55.058 91.75,58.75 109.875,58.75 v1(112.875,55.75) 112.875,39 v1(106.5,32.625)
VIN: C14.2 C15.2 D3.C U4.3 U4.4 | length 37.8
  Top Layer w0.2: v1(65.425,29.8) v1@65.447,29.8 ; U4.3 v1@65.447,29.8 ; C15.2 68.62,26.905 67.645,27.88 U4.4 66.097,29.15 v1@65.447,29.8
  Top Layer w0.8: C14.2 68.61,24.26 68.61,26.74 C15.2 ; v1(82,37.75) 84,39.75 D3.C D3.C@89.045,38.92
  Bottom Layer w0.8: v1(65.425,29.8) 74.175,29.8 81.5,37.125
VUSB: C6.2 C7.1 C11.1 C12.2 D2.A J4.1 U2.8 U3.1 | length 94.2
  Top Layer w0.2: U2.8 98.9,10 99.626,9.274 C6.2 ; 109.25,8.625 109.275,8.65 J4.1
  Top Layer w0.8: C11.1 43.3,36.975 43.395,36.88 C12.2 47.22,36.88 47.3,36.8 U3.1@47.39,36.8 ; v1(47.25,40.615) 47.34,40.525 47.34,36.85 U3.1@47.39,36.8 ; U3.1 U3.1@47.39,36.8 ; v1(87.75,3.25) D2.A ; C6.2 101.89,9.274 102.114,9.05 C7.1 104.2,9.05 104.625,8.625 109.25,8.625
  Bottom Layer w0.8: v1(47.25,40.615) 47.514,40.615 84.879,3.25 v1(87.75,3.25) 93.875,9.375 v1(100,9.375)
pads on no net: J1.1 J1.2 J1.8 J1.DL J1.DS J1.SM1 J1.SM2 J1.SM3 J1.SM4 J4.4 J4.SH1 J4.SH2 J4.SH3 J4.SH4 J4.SH5 J4.SH6 S1.2 S1.4 S2.2 S2.4 U1.4 U1.5 U1.14 U1.16 U1.17 U1.18 U1.19 U1.20 U1.21 U1.22 U1.26 U1.27 U1.28 U1.29 U1.31 U1.32 U1.33 U2.1 U2.2 U2.9 U2.10 U2.11 U2.12 U2.13 U2.14 U2.15 U2.16 U2.17 U2.18 U2.19 U2.20 U2.21 U2.22 U2.23 U2.27

## Keep-outs
Keep-Out Layer:
  the board outline again, w0.508

## Silkscreen, mask and mechanical layers (free items; w line width, h text height)
Board:
  the board outline again, w0.508
Drill Drawing:
  circle w0.254: c133.507,30.584 r0.921
  lines w0.254: 132.586,13.542 133.046,13.542 133.046,13.082 133.968,13.082 133.968,13.542 134.428,13.542 134.428,14.463 133.968,14.463 133.968,14.924 133.046,14.924 133.046,14.463 132.586,14.463 132.586,13.542 ; 132.586,17.227 133.507,17.687 134.428,17.227 133.968,18.148 134.428,19.069 133.507,18.609 132.586,19.069 133.046,18.148 132.586,17.227 ; 132.586,21.372 134.428,21.372 134.428,23.214 132.586,23.214 132.586,21.372 ; 132.586,27.36 134.428,27.36 133.507,25.517 132.586,27.36 ; 132.586,33.808 132.586,34.269 133.046,34.729 132.586,35.19 132.586,35.65 133.046,35.65 133.507,35.19 133.968,35.65 134.428,35.65 134.428,35.19 133.968,34.729 134.428,34.269 134.428,33.808 133.968,33.808 133.507,34.269 133.046,33.808 132.586,33.808
  lines w0.381: 130.941,11.838 309.498,11.838 ; 130.941,36.71 309.498,36.71 ; 141.587,7.693 141.587,40.855 ; 150.342,7.693 150.342,40.855 ; 168.598,7.693 168.598,40.855 ; 176.854,7.693 176.854,40.855 ; 188.868,7.693 188.868,40.855 ; 211.623,7.693 211.623,40.855 ; 221.47,7.693 221.47,40.855 ; 234.332,7.693 234.332,40.855 ; 255.714,7.693 255.714,40.855 ; 268.632,7.693 268.632,40.855 ; 288.714,7.693 288.714,40.855 ; 130.941,7.693 309.498,7.693 309.498,40.855 130.941,40.855 130.941,7.693
  text "Symbol" at 133.428,37.953 h2.4
  text "Count" at 142.83,37.953 h2.4
  text "Hole Size" at 151.585,37.953 h2.4
  text "Plated" at 169.842,37.953 h2.4
  text "Hole Type" at 178.097,37.953 h2.4
  text "Drill Layer Pair" at 190.111,37.953 h2.4
  text "Via/Pad" at 212.866,37.953 h2.4
  text "Pad Shape" at 222.714,37.953 h2.4
  text "Template" at 235.576,37.953 h2.4
  text "Description" at 256.958,37.953 h2.4
  text "Hole Tolerance (+)" at 269.875,37.953 h2.4
  text "Hole Tolerance (-)" at 289.957,37.953 h2.4
  text "1" at 142.83,33.808 h2
  text "0.620mm (24.41mil)" at 151.585,33.808 h2
  text "PTH" at 169.842,33.808 h2
  text "Round" at 178.097,33.808 h2
  text "Top Layer - Bottom Layer" at 190.111,33.808 h2
  text "Via" at 212.866,33.808 h2
  text "Rounded" at 222.714,33.808 h2
  text "v100h62" at 235.576,33.808 h2
  text "1" at 142.83,29.663 h2
  text "1.000mm (39.37mil)" at 151.585,29.663 h2
  text "PTH" at 169.842,29.663 h2
  text "Slot" at 178.097,29.663 h2
  text "Top Layer - Bottom Layer" at 190.111,29.663 h2
  text "Pad" at 212.866,29.663 h2
  text "Rounded" at 222.714,29.663 h2
  text "r440_220h100_360r100" at 235.576,29.663 h2
  text "2" at 142.83,25.517 h2
  text "1.000mm (39.37mil)" at 151.585,25.517 h2
  text "PTH" at 169.842,25.517 h2
  text "Slot" at 178.097,25.517 h2
  text "Top Layer - Bottom Layer" at 190.111,25.517 h2
  text "Pad" at 212.866,25.517 h2
  text "Rounded" at 222.714,25.517 h2
  text "r400_200h100_320r100" at 235.576,25.517 h2
  text "16" at 142.83,21.372 h2
  text "0.900mm (35.43mil)" at 151.585,21.372 h2
  text "PTH" at 169.842,21.372 h2
  text "Round" at 178.097,21.372 h2
  text "Top Layer - Bottom Layer" at 190.111,21.372 h2
  text "Pad" at 212.866,21.372 h2
  text "(Mixed)" at 222.714,21.372 h2
  text "(Mixed)" at 235.576,21.372 h2
  text "22" at 142.83,17.227 h2
  text "0.400mm (15.75mil)" at 151.585,17.227 h2
  text "PTH" at 169.842,17.227 h2
  text "Round" at 178.097,17.227 h2
  text "Top Layer - Bottom Layer" at 190.111,17.227 h2
  text "Via" at 212.866,17.227 h2
  text "Rounded" at 222.714,17.227 h2
  text "(Mixed)" at 235.576,17.227 h2
  text "43" at 142.83,13.082 h2
  text "0.711mm (28.00mil)" at 151.585,13.082 h2
  text "PTH" at 169.842,13.082 h2
  text "Round" at 178.097,13.082 h2
  text "Top Layer - Bottom Layer" at 190.111,13.082 h2
  text "Via" at 212.866,13.082 h2
  text "Rounded" at 222.714,13.082 h2
  text "v127h71" at 235.576,13.082 h2
  text "85 Total" at 142.83,8.936 h2
  text "Slot definitions :" at 133.428,6.035 h2
  text "Routed Path Length" at 147.068,6.035 h2
  text "= Calculated from tool start centre position to tool end centre position." at 163.964,6.035 h2
  text "Hole Length" at 147.068,4.376 h2
  text "= Routed Path Length + Tool Size = Slot length as defined in the PCB layout" at 157.693,4.376 h2

## Text inside footprints (layer, text, board x,y; h text height)
J1: Mechanical 13 "Card Lock Position" at 116.805,21.399 h0.41 r270
J4: Mechanical 13 "PCB Edge" at 117.594,5.805 h0.81 r90